# Altium PCB BQ25895-TEST.PcbDoc
Units mm, origin at the board's own origin, x right, y up, seen from the top; angles counter-clockwise.
Board outline 70 x 60 mm, 2 copper layers (Top Layer, Bottom Layer), stack 1.67 mm thick; 48 components, 46 nets, 185 pads, 61 vias.
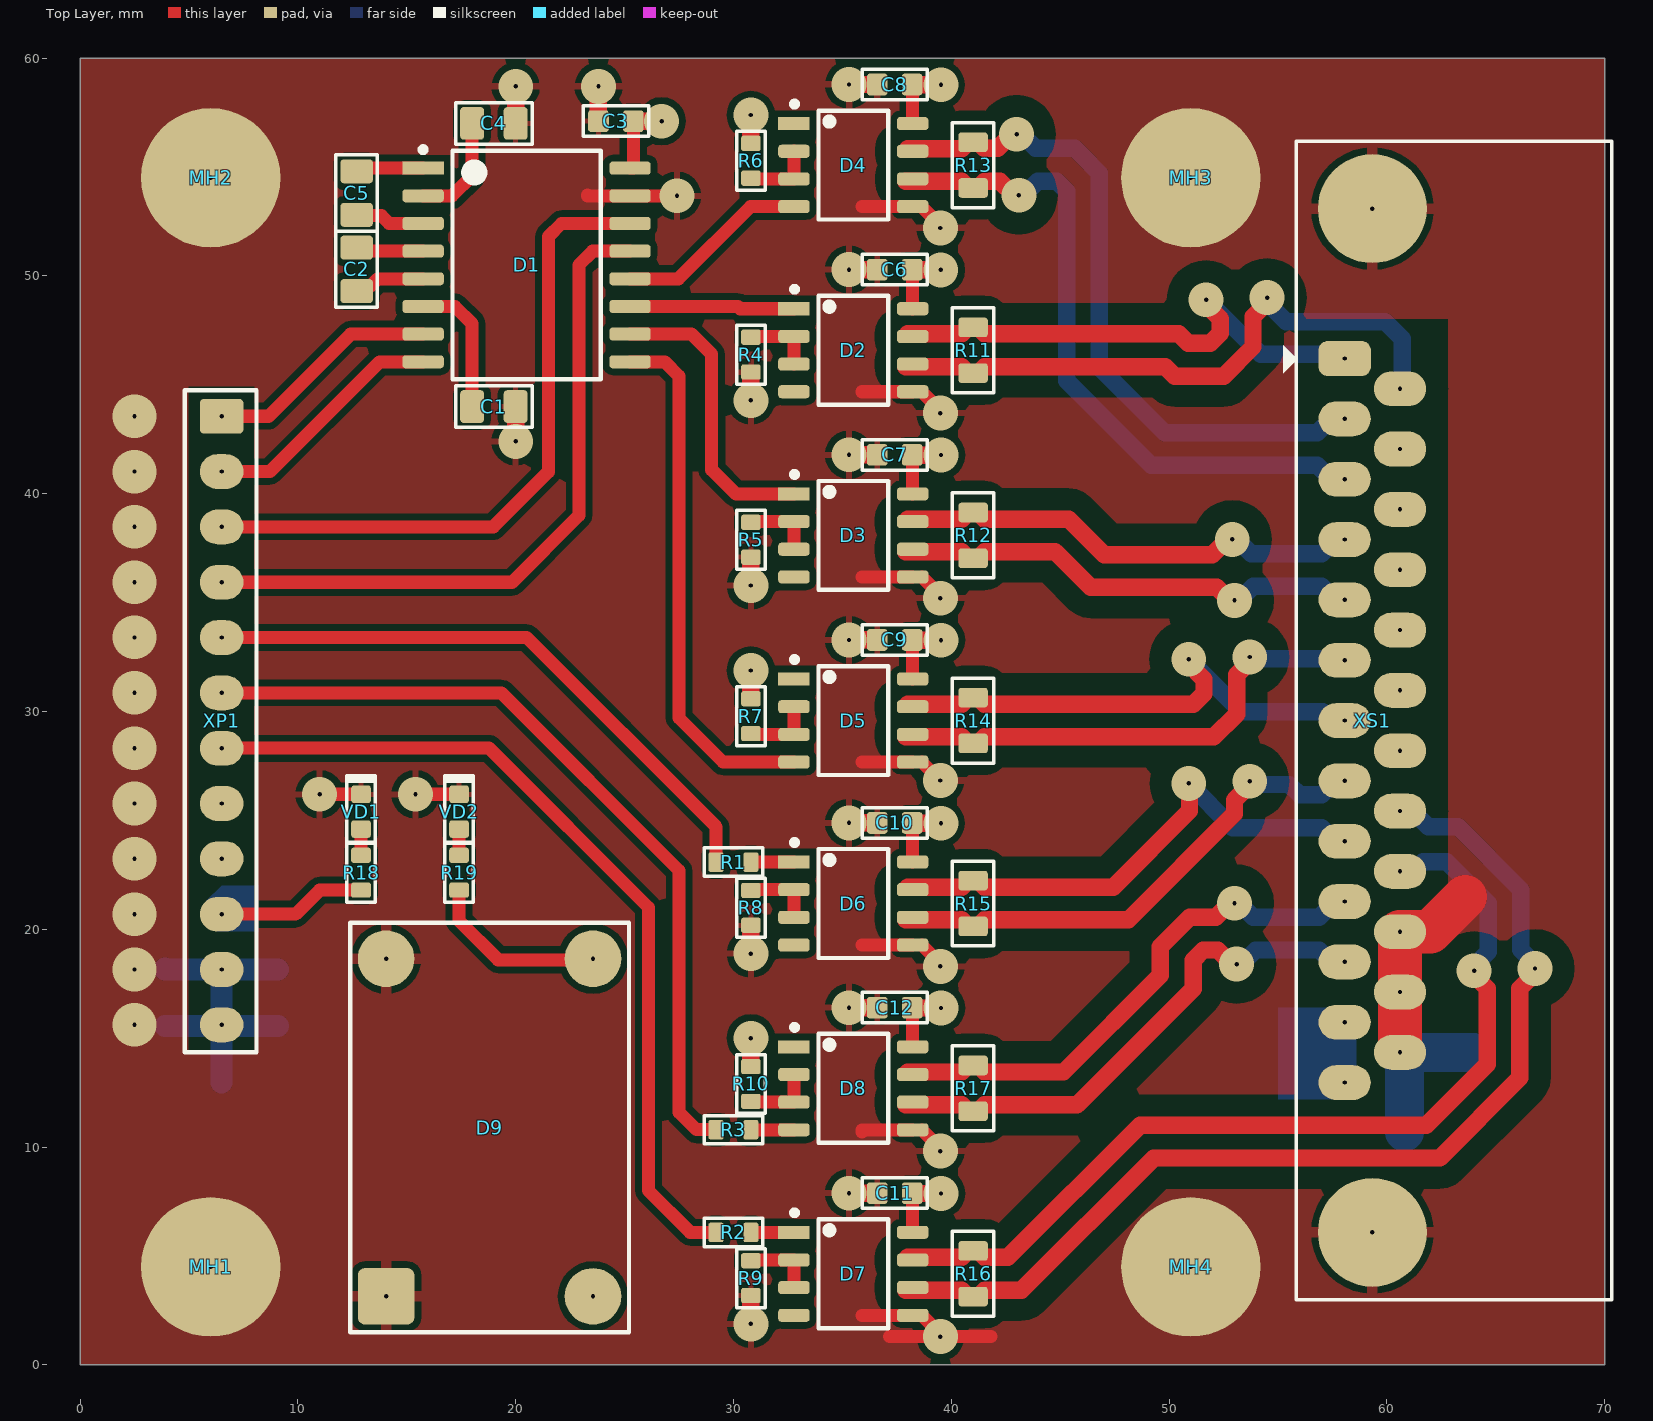
[diagram p0: Top Layer view]
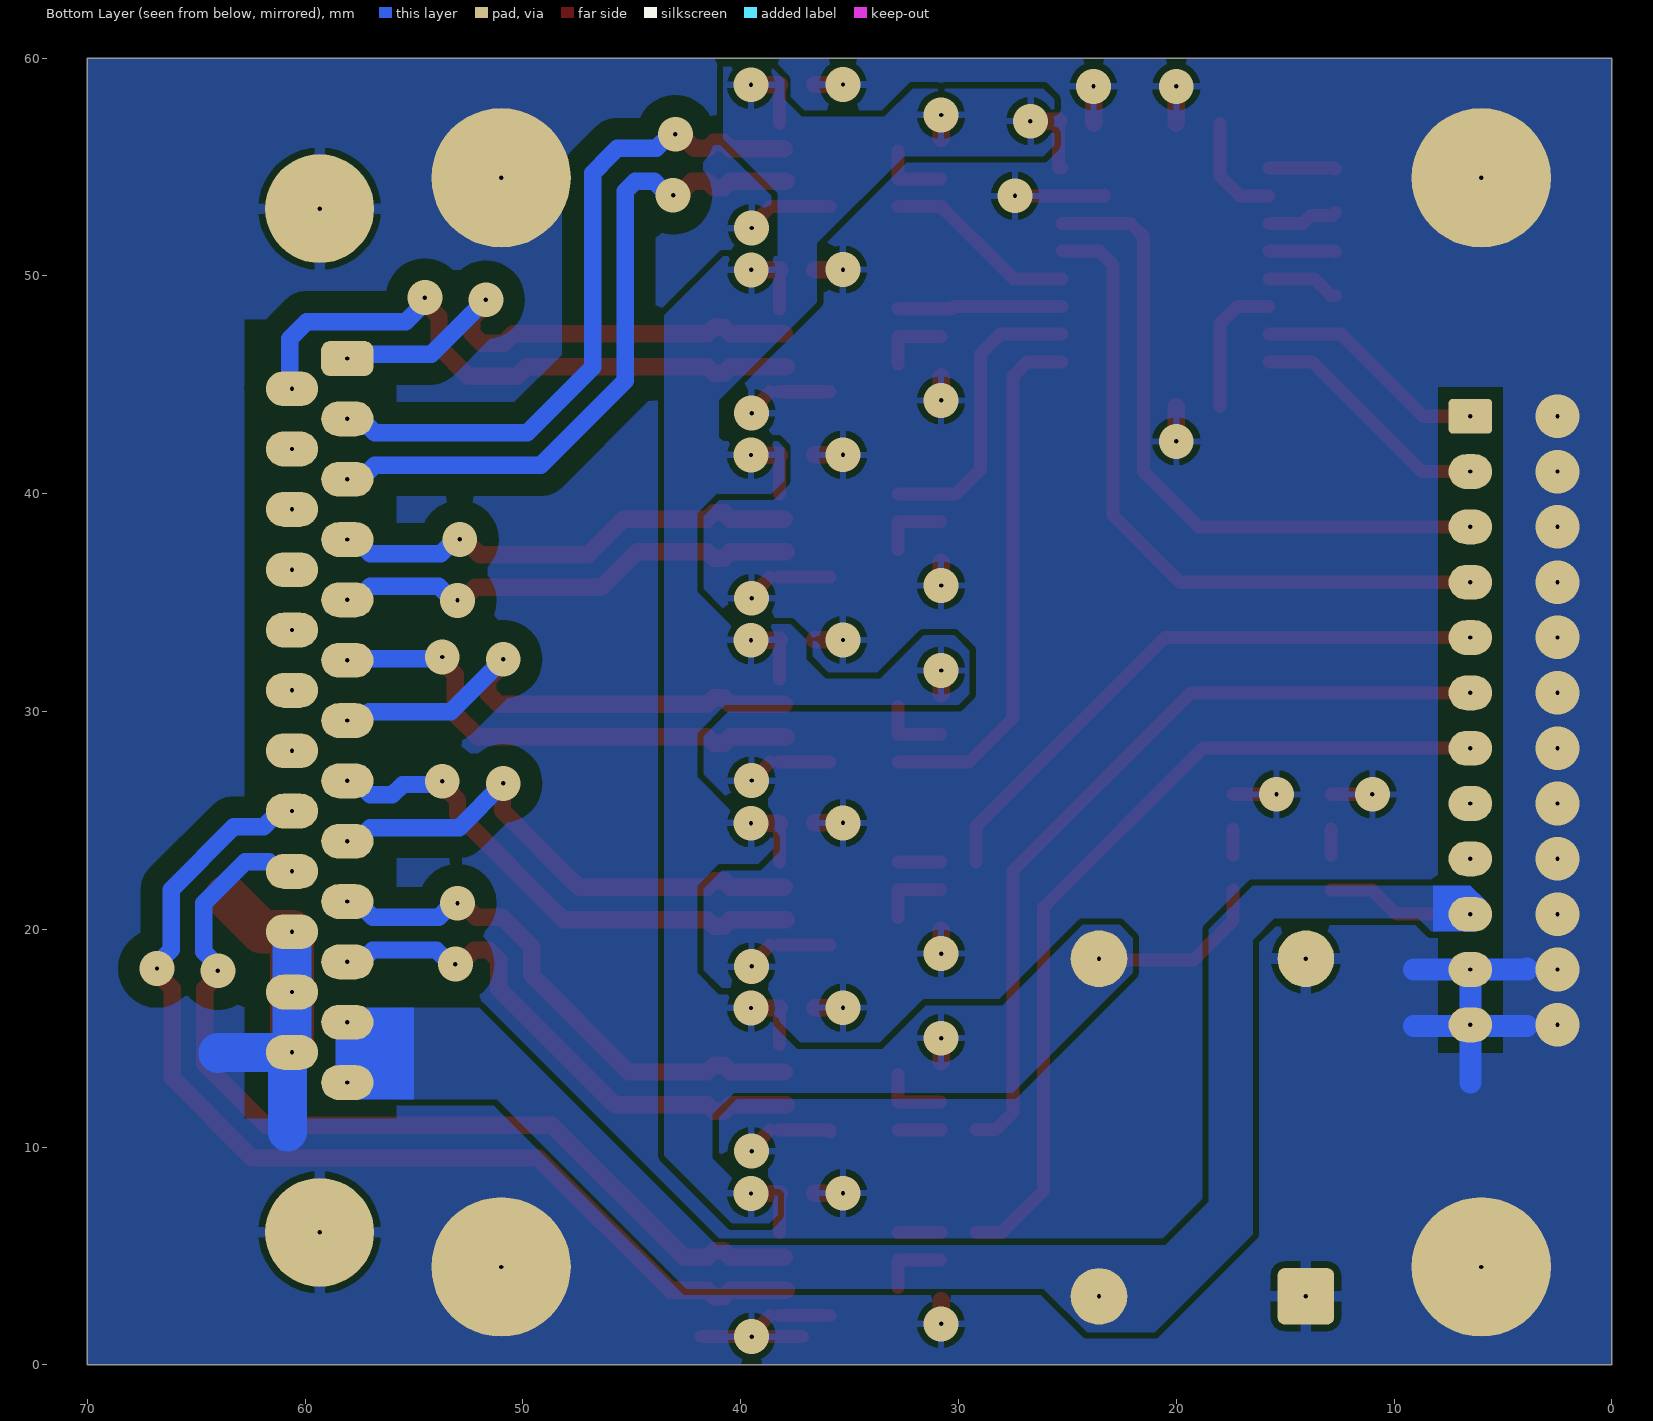
[diagram p1: Bottom Layer view, seen from below]
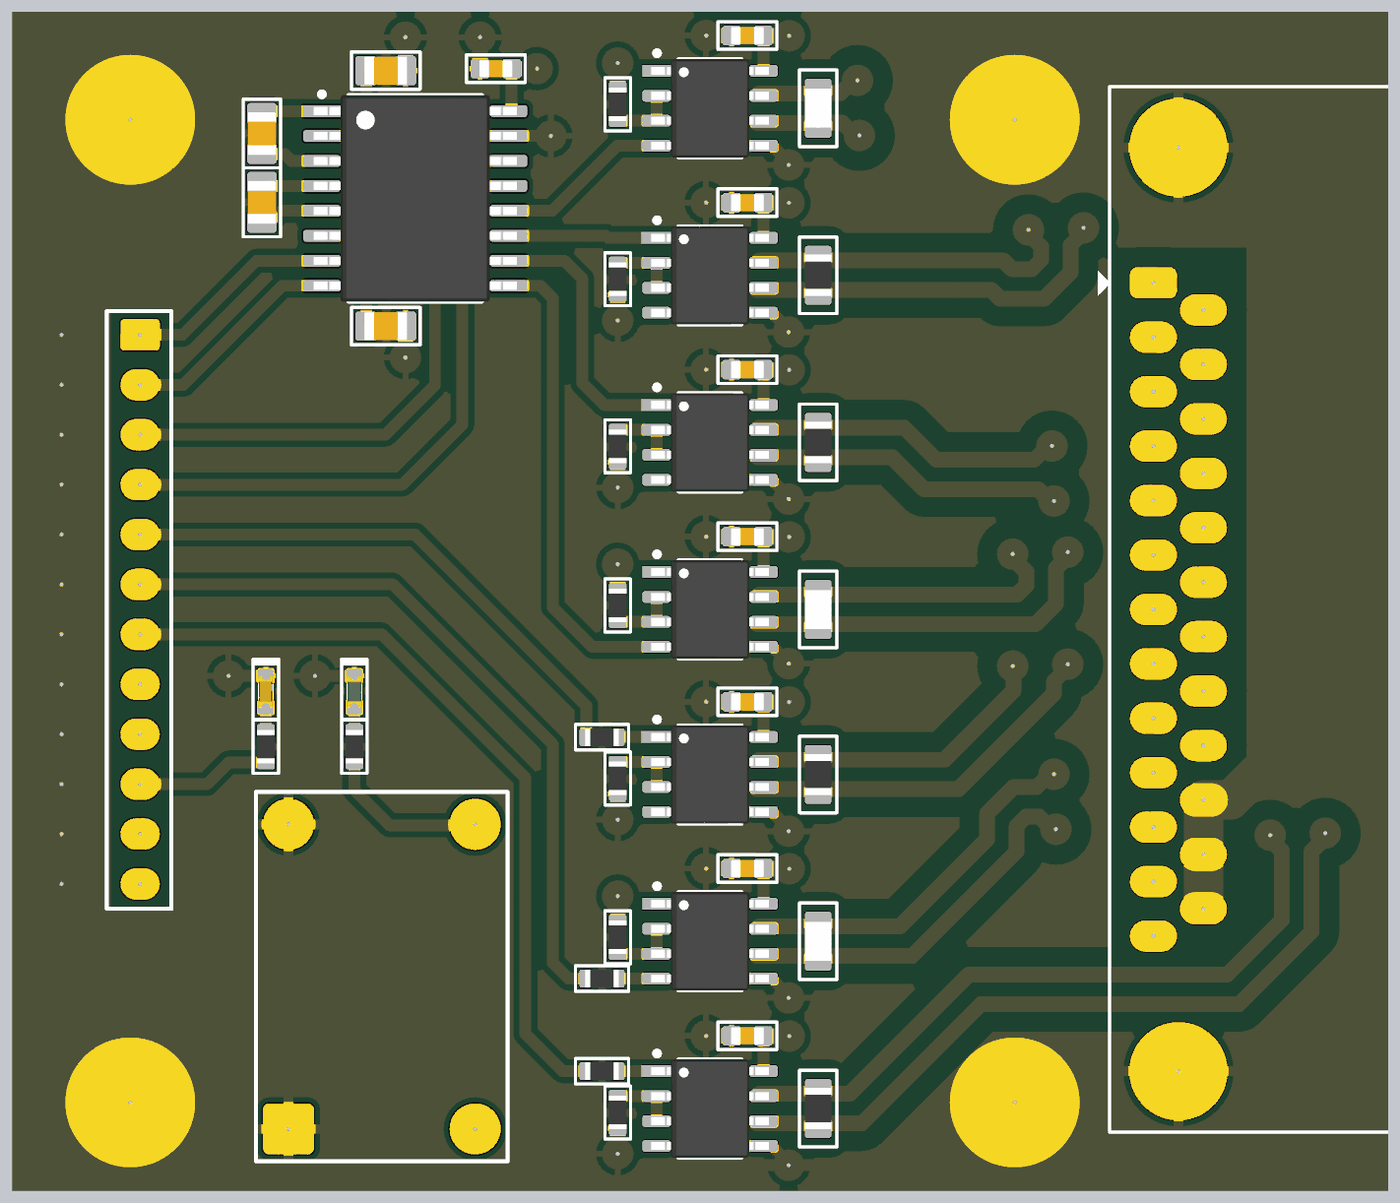
[diagram p2: 3D render of the assembled board from above, using the file's embedded part models]

## Layer stack, top to bottom
Top Layer: signal copper 0.035
Core-1: core 1.6, FR-4, Dk 4.6
Bottom Layer: signal copper 0.035

## Board outline
0,0 0,60 70,60 70,0

## Design rules (kind name [scope] priority, off if disabled: settings)
Clearance Clearance_POLY_RS-485 [InPolygon AND InNet('GND') vs InNetClass('RS-485')] p1: gap=0.3 ignorepadtopadclearanceinfootprint=FALSE except(0: Arc-Hole Track-Hole SMDPad-Hole THPad-Hole Via-Hole Fill-Hole Poly-Hole Region-Hole Text-Hole; 1: Track-Poly SMDPad-Poly THPad-Poly Via-Poly)
Clearance [All] p2: gap=0.3 ignorepadtopadclearanceinfootprint=FALSE
DiffPairsRouting DiffPairsRouting_DIFF120 [InDifferentialPairClass('DIFF120')] p1: maxlimit=0.7 minlimit=0.7 mostfreqgap=0.7 toplayer_minwidth=0.8 toplayer_maxwidth=1 toplayer_prefwidth=0.8 bottomlayer_minwidth=0.8 bottomlayer_maxwidth=1 bottomlayer_prefwidth=0.8 maxuncoupledlength=12.7
DiffPairsRouting [All] p2: maxlimit=0.6 minlimit=0.254 mostfreqgap=0.254 toplayer_minwidth=0.381 toplayer_maxwidth=0.6 toplayer_prefwidth=0.381 bottomlayer_minwidth=0.381 bottomlayer_maxwidth=0.6 bottomlayer_prefwidth=0.381 maxuncoupledlength=12.7
HoleSize [All] p1: absolutevalues=TRUE maxlimit=3.5 minlimit=0.025 maxpercent=80.000 minpercent=20.000
PolygonConnect [All] p1: connectstyle=Relief reliefconductorwidth=0.254 reliefentries=4 polygonreliefangle="90 Angle" airgapwidth=0.254
RoutingVias [All] p1: holewidth=0.711 width=1.27 viastyle="Through Hole" minholewidth=0.2 minwidth=1 maxholewidth=1.5 maxwidth=2.6
SolderMaskExpansion [All] p1: expansion=0.102 istentingtop=FALSE
Width [All] p1: maxlimit=3 minlimit=0.254 preferedwidth=0.254 minimp=50.000000 maximp=50.000000 favimp=50.000000
28 further rules are at their usual default settings.

## Classes and differential pairs
net class RS-485: RS232_CTS_N RS232_CTS_P RS232_RTS_N RS232_RTS_P RS232_RxD_N RS232_RxD_P RS232_TxD_N RS232_TxD_P SYNC_IN1_N SYNC_IN1_P SYNC_IN2_N SYNC_IN2_P SYNC_OUT_N SYNC_OUT_P
differential pair class DIFF120: RS232_CTS RS232_RTS RS232_RxD RS232_TxD SYNC_IN1 SYNC_IN2 SYNC_OUT
differential pair SYNC_OUT: +SYNC_OUT_P -SYNC_OUT_N
differential pair SYNC_IN2: +SYNC_IN2_P -SYNC_IN2_N
differential pair SYNC_IN1: +SYNC_IN1_P -SYNC_IN1_N
differential pair RS232_TxD: +RS232_TxD_P -RS232_TxD_N
differential pair RS232_RxD: +RS232_RxD_P -RS232_RxD_N
differential pair RS232_RTS: +RS232_RTS_P -RS232_RTS_N
differential pair RS232_CTS: +RS232_CTS_P -RS232_CTS_N

## Components (designator, comment, footprint, x,y, rotation, side; value= is the part's Value field where it differs from the comment)
C1 "10uF" CAPC_0805_2.0x1.2x1.35mm 19,44 r180 top value=10мкФ
C2 "10uF" CAPC_0805_2.0x1.2x1.35mm 12.7,50.3 r90 top value=10мкФ
C3 "0,1uF" CAPC_0603_1.6x0.8x0.9mm 24.6,57.1 r0 top value=0,1мкФ
C4 "10uF" CAPC_0805_2.0x1.2x1.35mm 19,57 r0 top value=10мкФ
C5 "10uF" CAPC_0805_2.0x1.2x1.35mm 12.7,53.8 r90 top value=10мкФ
C6 "0,1uF" CAPC_0603_1.6x0.8x0.9mm 37.4,50.285 r0 top value=0,1мкФ
C7 "0,1uF" CAPC_0603_1.6x0.8x0.9mm 37.4,41.785 r0 top value=0,1мкФ
C8 "0,1uF" CAPC_0603_1.6x0.8x0.9mm 37.4,58.785 r0 top value=0,1мкФ
C9 "0,1uF" CAPC_0603_1.6x0.8x0.9mm 37.4,33.285 r0 top value=0,1мкФ
C10 "0,1uF" CAPC_0603_1.6x0.8x0.9mm 37.4,24.885 r0 top value=0,1мкФ
C11 "0,1uF" CAPC_0603_1.6x0.8x0.9mm 37.4,7.885 r0 top value=0,1мкФ
C12 "0,1uF" CAPC_0603_1.6x0.8x0.9mm 37.4,16.4 r0 top value=0,1мкФ
D1 "MAX3232CDW" AD_RW-16_SOIC127P1030X265-16N 20.5,50.5 r0 top
D2 "ADM3072EARZ" TI_D0008A_8-SOIC_SOIC127P600X175-8N 35.5,46.585 r0 top
D3 "ADM3072EARZ" TI_D0008A_8-SOIC_SOIC127P600X175-8N 35.5,38.085 r0 top
D4 "ADM3072EARZ" TI_D0008A_8-SOIC_SOIC127P600X175-8N 35.5,55.085 r0 top
D5 "ADM3072EARZ" TI_D0008A_8-SOIC_SOIC127P600X175-8N 35.5,29.585 r0 top
D6 "ADM3072EARZ" TI_D0008A_8-SOIC_SOIC127P600X175-8N 35.5,21.185 r0 top
D7 "ADM3072EARZ" TI_D0008A_8-SOIC_SOIC127P600X175-8N 35.5,4.185 r0 top
D8 "ADM3072EARZ" TI_D0008A_8-SOIC_SOIC127P600X175-8N 35.5,12.7 r0 top
D9 "MP2307_DCDC" MP2307 18.8,10.9 r90 top
MH1 "M3" "MH M3 Drill=3.2mm Pad=6.4mm v2" 6,4.5 r0 top
MH2 "M3" "MH M3 Drill=3.2mm Pad=6.4mm v2" 6,54.5 r0 top
MH3 "M3" "MH M3 Drill=3.2mm Pad=6.4mm v2" 51,54.5 r0 top
MH4 "M3" "MH M3 Drill=3.2mm Pad=6.4mm v2" 51,4.5 r0 top
R1 "100R" RESC_0603_1.6x0.8x0.45mm 30,23.085 r0 top value=100
R2 "100R" RESC_0603_1.6x0.8x0.45mm 30,6.085 r0 top value=100
R3 "100R" RESC_0603_1.6x0.8x0.45mm 30,10.8 r0 top value=100
R4 "4,7k" RESC_0603_1.6x0.8x0.45mm 30.8,46.385 r270 top value=4,7к
R5 "4,7k" RESC_0603_1.6x0.8x0.45mm 30.8,37.885 r270 top value=4,7к
R6 "4,7k" RESC_0603_1.6x0.8x0.45mm 30.8,55.285 r90 top value=4,7к
R7 "4,7k" RESC_0603_1.6x0.8x0.45mm 30.8,29.785 r90 top value=4,7к
R8 "4,7k" RESC_0603_1.6x0.8x0.45mm 30.8,20.985 r270 top value=4,7к
R9 "4,7k" RESC_0603_1.6x0.8x0.45mm 30.8,3.985 r270 top value=4,7к
R10 "4,7k" RESC_0603_1.6x0.8x0.45mm 30.8,12.9 r90 top value=4,7к
R11 "120R" RESC_0805_2.0x1.25x0.65mm 41,46.585 r270 top value=120
R12 "120R" RESC_0805_2.0x1.25x0.65mm 41,38.085 r270 top value=120
R13 "120" RESC_0805_2.0x1.25x0.65mm 41,55.085 r270 top
R14 "120" RESC_0805_2.0x1.25x0.65mm 41,29.585 r270 top
R15 "120R" RESC_0805_2.0x1.25x0.65mm 41,21.185 r270 top value=120
R16 "120R" RESC_0805_2.0x1.25x0.65mm 41,4.185 r270 top value=120
R17 "120" RESC_0805_2.0x1.25x0.65mm 41,12.7 r270 top
R18 "2k" RESC_0603_1.6x0.8x0.45mm 12.9,22.6 r270 top value=2к
R19 "240R" RESC_0603_1.6x0.8x0.45mm 17.4,22.6 r270 top value=240
VD1 "\"+12V\"" LED_0603_1.6x0.8x0.75mm_RED 12.9,25.4 r270 top
VD2 "\"+3.3V\"" LED_0603_1.6x0.8x0.75mm_GREEN 17.4,25.4 r270 top
XP1 "PLS-12_2.54mm" PLS-12_2.54mm 6.5,29.585 r270 top
XS1 "09663526613" "D-Sub 25F RA PTH HARTING 09663526613" 59.33,29.585 r90 top

## Footprints (in the part's own frame and the unit in brackets; to place one, negate y for a bottom-side part, rotate by r counter-clockwise, add the part's x,y. Pads: shape width x height; smd on the part's side, far side on the other; paste and mask are expansions set on the pad)
AD_RW-16_SOIC127P1030X265-16N [mm] "SOIC, 16-Leads, Body 10,30x7,50mm, Pitch 1,27mm, IPC Medium Density"
  rect 1.9x0.6 smd: 1(-4.75,4.445)
  rrect50% 1.9x0.6 smd: 2(-4.75,3.175) 3(-4.75,1.905) 4(-4.75,0.635) 5(-4.75,-0.635) 6(-4.75,-1.905) 7(-4.75,-3.175) 8(-4.75,-4.445) 9(4.75,-4.445) 10(4.75,-3.175) 11(4.75,-1.905) 12(4.75,-0.635) 13(4.75,0.635) 14(4.75,1.905) 15(4.75,3.175) 16(4.75,4.445)
  silkscreen extent -4.87,-5.25 3.4,5.42, body extent -5.16,-5.25 5.16,5.25, height 2.65
CAPC_0603_1.6x0.8x0.9mm [mm]
  rrect30% 0.95x1 smd mask+0.05: 1(-0.8,0) 2(0.8,0)
  silkscreen extent -1.5,-0.7 1.5,0.7, body extent -0.85,-0.45 0.85,0.45, height 0.9
CAPC_0805_2.0x1.2x1.35mm [mm] "Chip Capacitor, 2-Leads, Body 2.10x1.35mm, IPC Medium Density"
  rrect30% 1.1x1.5 smd mask+0.05: 1(-1,0) 2(1,0)
  silkscreen extent -1.75,-0.95 1.75,0.95, body extent -1.1,-0.72 1.1,0.73, height 1.35
"D-Sub 25F RA PTH HARTING 09663526613" [mm]
  rrect50% 1.6x2.4 hole 0.2 mask+0.05: 1(16.62,1.27)
  oval 1.6x2.4 hole 0.2 mask+0.05: 2(13.85,1.27) 3(11.08,1.27) 4(8.31,1.27) 5(5.54,1.27) 6(2.77,1.27) 7(0,1.27) 8(-2.77,1.27) 9(-5.54,1.27) 10(-8.31,1.27) 11(-11.08,1.27) 12(-13.85,1.27) 13(-16.62,1.27) 14(15.235,-1.27) 15(12.465,-1.27) 16(9.695,-1.27) 17(6.925,-1.27) 18(4.155,-1.27) 19(1.385,-1.27) 20(-1.385,-1.27) 21(-4.155,-1.27) 22(-6.925,-1.27) 23(-9.695,-1.27) 24(-12.465,-1.27) 25(-15.235,-1.27)
  round 5 hole 0.2 mask+0.05: 26(-23.5,0) 27(23.5,0)
  silkscreen extent -26.6,-11 26.6,4.1, body extent -26.6,-17.9 26.6,3.3, height 13.61
LED_0603_1.6x0.8x0.75mm_GREEN [mm] "Kingbright APT1608"
  rrect30% 0.8x0.9 smd paste-0.05 mask+0.05: 1(-0.8,0) 2(0.8,0)
  silkscreen extent -1.65,-0.65 1.4,0.65, body extent -0.8,-0.4 0.8,0.4, height 0.6
LED_0603_1.6x0.8x0.75mm_RED [mm] "Kingbright APT1608"
  rrect30% 0.8x0.9 smd paste-0.05 mask+0.05: 1(-0.8,0) 2(0.8,0)
  silkscreen extent -1.65,-0.65 1.4,0.65, body extent -0.8,-0.4 0.8,0.4, height 0.6
"MH M3 Drill=3.2mm Pad=6.4mm v2" [mm]
  round 6.4 hole 0.2: 0(0,0)
MP2307 [mm] "SOIC, 16-Leads, Body 10,30x7,50mm, Pitch 1,27mm, IPC Medium Density"
  rrect25% 2.6x2.6 hole 0.2 paste-0.675 mask+0.076: 1(-7.75,4.75)
  round 2.6 hole 0.2 paste-0.675 mask+0.076: 2(-7.75,-4.75) 3(7.75,4.75) 4(7.75,-4.75)
  silkscreen extent -9.4,-6.4 9.4,6.4
PLS-12_2.54mm [mm]
  rrect25% 1.6x2 hole 0.2 paste-0.675 mask+0.076: 1(-13.97,0)
  oval 1.6x2 hole 0.2 paste-0.675 mask+0.076: 2(-11.43,0) 3(-8.89,0) 4(-6.35,0) 5(-3.81,0) 6(-1.27,0) 7(1.27,0) 8(3.81,0) 9(6.35,0) 10(8.89,0) 11(11.43,0) 12(13.97,0)
  silkscreen extent -15.17,-1.7 15.23,1.6
RESC_0603_1.6x0.8x0.45mm [mm]
  rrect30% 0.7x0.9 smd mask+0.05: 1(-0.8,0) 2(0.8,0)
  silkscreen extent -1.35,-0.65 1.35,0.65, body extent -0.85,-0.45 0.85,0.45, height 0.5
RESC_0805_2.0x1.25x0.65mm [mm] "Chip Resistor, 2-Leads, Body 2.00x1.25mm, IPC Medium Density"
  rrect30% 0.9x1.35 smd mask+0.05: 1(-1.05,0) 2(1.05,0)
  silkscreen extent -1.95,-0.95 1.95,0.95, body extent -1.05,-0.67 1.05,0.68, height 0.6
TI_D0008A_8-SOIC_SOIC127P600X175-8N [mm] "SOIC, 8-Leads, Body 4.90x3.90mm, Pitch 1.27mm, IPC Medium Density"
  rect 1.45x0.6 smd mask+0.05: 1(-2.725,1.905)
  rrect50% 1.45x0.6 smd mask+0.05: 2(-2.725,0.635) 3(-2.725,-0.635) 4(-2.725,-1.905) 5(2.725,-1.905) 6(2.725,-0.635) 7(2.725,0.635) 8(2.725,1.905)
  silkscreen extent -2.82,-2.5 1.6,2.92, body extent -3,-2.5 3,2.5, height 1.75

## Part data
C1 C2 C4 C5: library part CAP_FIXED_SMD_0805, "Capacitor Ceramic *pF ±*% *V X7R 0805", Dielectric=X7R, Max Operating Temperature=+125°C, Min Operating Temperature=-55°C, Package=0805, Tolerance=±*%, Voltage=*В, ComponentLink1Description="Datasheet Link", Mount=SMT, Name="10мкФ ±*% *В X7R 0805 * [*]", Number of Pins=2, Type="Конденсатор керамічний"
C3 C6 C7 C8 C9 C10 C11 C12: library part CAP_FIXED_SMD_0603, "Capacitor Ceramic *pF ±*% *V X7R 0603", Dielectric=X7R, Max Operating Temperature=+125°C, Min Operating Temperature=-55°C, Package=0603, Tolerance=±*%, Voltage=*В, ComponentLink1Description="Datasheet Link", Mount=SMT, Name="0,1мкФ ±*% *В X7R 0603 * [*]", Number of Pins=2, Type="Конденсатор керамічний"
D1: "MAX3232 3-V to 5.5-V Multichannel RS-232 Line Driver and Receiver With ±15-kV ESD Protection 16-SOIC [7.5mm]", Manufacturer="Maxim Integrated", Max Operating Temperature=+85°C, Min Operating Temperature=-40°C, Package="16-SOIC [7.5mm]", Component Function=RS-232, Mount=SMT, Name="MAX3232CDW [Maxim Integrated]", Number of Pins=16, Part Number=MAX3232CDW, Type=Мікросхема
D2 D3 D4 D5 D6 D7 D8: "3.3 V, ±15 kV ESD-Protected, Half- and Full-Duplex, RS-485/RS-422 Transceivers", Manufacturer="Analog Devices", Max Operating Temperature=+85°C, Min Operating Temperature=-40°C, Package="8-SOIC [3.9mm]", Component Function=RS-485, Mount=SMT, Name="ADM3072EARZ [Analog Devices]", Number of Pins=8, Part Number=ADM3072EARZ, Type=Мікросхема
D9: "MP2307 DCDC Module", Manufacturer="Analog Devices", Max Operating Temperature=+85°C, Min Operating Temperature=-40°C, Package="8-SOIC [3.9mm]", Component Function=RS-485, Mount=SMT, Name="MP2307_DCDC [Analog Devices]", Number of Pins=8, Part Number=MP2307_DCDC, Type=Мікросхема
MH1 MH2 MH3 MH4: library part "MOUNTING HOLE M3 v2", "Mounting Hole"
R1 R2 R3 R4 R5 R6 R7 R8 R9 R10 R18 R19: library part RES_FIXED_SMD_0603, "Resistor SMD * Ohm ±*% ±*ppm/°C 1/10W 0603", Manufacturer=Yageo, Max Operating Temperature=+125°C, Min Operating Temperature=-55°C, Package=0603, Power Rating="1/10 Вт", Tolerance=±1%, ComponentLink1Description="Datasheet Link", Mount=SMT, Number of Pins=2, Type=Резистор
  R1 R2 R3: Name="100Ом ±1% 1/10 Вт 0603 * [Yageo]"
  R4 R5 R6 R7 R8 R9 R10: Name="4,7кОм ±1% 1/10 Вт 0603 * [Yageo]"
  R18: Name="2кОм ±1% 1/10 Вт 0603 * [Yageo]"
  R19: Name="240Ом ±1% 1/10 Вт 0603 * [Yageo]"
R11 R12 R13 R14 R15 R16 R17: library part RES_FIXED_SMD_0805, "Resistor SMD * Ohm ±*% ±*ppm/°C 1/8W 0805", Manufacturer=Yageo, Max Operating Temperature=+125°C, Min Operating Temperature=-55°C, Package=0805, Power Rating="1/8 Вт", Tolerance=±1%, ComponentLink1Description="Datasheet Link", Mount=SMT, Name="120Ом ±1% 1/8 Вт 0805 * [Yageo]", Number of Pins=2, Type=Резистор
VD1: library part "LED SMD 0603 RED", "LED Red 1.95V 20mA SMD 0603", Color=Червоний, Current=20мА, Forward Voltage=1.95В, Manufacturer=Kingbright, Max Operating Temperature=+85°C, Min Operating Temperature=-40°C, Package=0603, Part Number=APT1608SURCK, Voltage=250V, ComponentLink1Description="Datasheet Link", Mount=SMT, Name="APT1608SURCK [Kingbright]", Number of Pins=2, Type=Діод
VD2: library part "LED SMD 0603 GREEN", "LED Green 2.1V 20mA SMD 0603", Color=Зелений, Current=20мА, Forward Voltage=2.1В, Manufacturer=Kingbright, Max Operating Temperature=+85°C, Min Operating Temperature=-40°C, Package=0603, Part Number=APT1608CGCK, Voltage=250V, ComponentLink1Description="Datasheet Link", Mount=SMT, Name="APT1608CGCK [Kingbright]", Number of Pins=2, Type=Діод
XP1: Manufacturer=Molex, Max Operating Temperature=+125°C, Min Operating Temperature=-55°C, Part Number=0702461201, ComponentLink1Description="Datasheet Link", Mount=PTH, Name="PLS-12_2.54mm 0702461201 [Molex]", Number of Pins=12, System=Connector, Type=Вилка
XS1: library part "D-Sub 25F RA PTH HARTING 09663526613", "D-Sub Receptacle 25 Position Through-Hole Right-Angle", Manufacturer=HARTING, Max Operating Temperature=+125°C, Min Operating Temperature=-55°C, ComponentLink1Description="Datasheet Link", Mount=PTH, Name="D-Sub Receptacle 25 Position Through-Hole Right-Angle 09663526613 [HARTING]", Number of Pins=25, Part Number=09663526613, System=Connector, Type=Вилка

## Via types
v1: diameter 1.6, hole 0.2, Top Layer to Bottom Layer, tented both sides, 49 vias
v2: diameter 2, hole 0.2, Top Layer to Bottom Layer, tented both sides, 12 vias

## Nets (pads, with @x,y where several pads share a name; then routed paths per layer and width w, separated by ;. In a path a pad name is that pad's centre, name@x,y a point inside that pad or via, vN(x,y) a via of type N, cw(c..) or ccw(c..) an arc to the next point about the centre after c; other vN are vias at no path point)
+3.3V: C3.2 C6.2 C7.2 C8.2 C9.2 C10.2 C11.2 C12.2 D1.16 D2.8 D3.8 D4.8 D5.8 D6.8 D7.8 D8.8 D9.4 R6.2 R7.2 R10.2 R19.2 | length 36.8
  Top Layer w0.6: R19.2 17.4,20.4 19.2,18.6 23.5,18.6 D9.4 ; D1.16 25.4,54.945 C3.2 ; C6.2 38.213,50.273 38.213,48.49 D2.8 ; D7.8 C11.2@38.225,7.872 ; D8.8@38.225,14.705 C12.2@38.225,16.488 ; D6.8 C10.2@38.225,24.873 ; D5.8 C9.2@38.225,33.272 ; D3.8 C7.2@38.225,41.772 ; D4.8 C8.2@38.225,58.772
  Top Layer w0.8: C3.2 v1(26.7,57.1) ; R10.2@30.8,13.925 v1(30.8,15) ; R7.2@30.8,30.81 v1(30.8,31.885) ; R6.2@30.8,56.31 v1(30.8,57.385) ; C6.2@38.213,50.273 v1(39.513,50.273) ; C11.2@38.225,7.872 v1(39.525,7.872) ; C12.2@38.225,16.388 v1(39.525,16.388) ; C10.2@38.225,24.873 v1(39.525,24.873) ; C9.2@38.225,33.272 v1(39.525,33.272) ; C7.2@38.225,41.772 v1(39.525,41.772) ; C8.2@38.225,58.772 v1(39.525,58.772)
+12V: D9.2 R18.2 XP1.10 XS1.12 XS1.13 | length 6.9
  Top Layer w0.6: XP1.10 9.895,20.695 11,21.8 R18.2
CTS: D1.11 D2.1 | length 7.6
  Top Layer w0.6: D1.11 30.205,48.595 30.31,48.49 D2.1
GND: C1.1 C3.1 C4.2 C6.1 C7.1 C8.1 C9.1 C10.1 C11.1 C12.1 D1.15 D2.5 D3.5 D4.5 D5.5 D6.5 D7.5 D8.5 D9.1 D9.3 MH1.0 MH2.0 MH3.0 MH4.0 R4.2 R5.2 R8.2 R9.2 VD1.1 VD2.1 XP1.11 XP1.12 XS1.23 XS1.24 XS1.25 XS1.26 XS1.27 | length 93.5
  Top Layer w0.6: v1(11,26.2) VD1.1 ; v1(15.4,26.2) VD2.1 ; 23.3,53.7 23.3,53.675 D1.15 v1(27.405,53.675) ; C3.1@23.7,57.2 C3.1 ; 35.9,2.28 D7.5 ; 35.9,10.7 35.9,10.795 D8.5 ; 35.9,19.28 D6.5 ; 35.9,27.68 D5.5 ; 35.9,36.18 D3.5 ; 35.9,44.68 D2.5 ; 35.9,53.18 D4.5 38.65,53.18 39.5,52.33 v1(39.5,52.2) ; 37.175,1.3 v1(39.5,1.3) 41.825,1.3 ; D7.5@38.65,2.28 v1@39.5,1.43 ; D8.5@38.65,10.795 v1@39.5,9.945 ; D6.5@38.65,19.28 v1@39.5,18.43 ; D5.5@38.65,27.68 v1(39.5,26.83) ; D3.5@38.65,36.18 v1@39.5,35.33 ; D2.5@38.65,44.68 v1@39.5,43.83
  Top Layer w0.8: v1(20,42.4) C1.1 ; C4.2 v1(20,58.7) ; C3.1@23.8,57 C3.1 v1(23.8,58.7) ; v1(30.8,1.885) R9.2@30.8,2.96 ; v1(30.8,18.885) R8.2@30.8,19.96 ; v1(30.8,35.785) R5.2@30.8,36.86 ; v1(30.8,44.285) R4.2@30.8,45.36 ; v1(35.3,7.885) C11.1 ; v1(35.3,16.4) C12.1 ; v1(35.3,24.885) C10.1 ; v1(35.3,33.285) C9.1 ; v1(35.3,41.785) C7.1 ; v1(35.3,50.285) C6.1 ; v1(35.3,58.785) C8.1
  Top Layer w2: XS1.25@60.6,14.6 XS1.24 XS1.23 61.99,19.89 63.6,21.5
  Bottom Layer w1: 3.9,15.555 XP1.12@6.5,15.555 ; 3.9,18.2 3.9,18.155 XP1.11 ; 6.5,12.955 XP1.12@6.5,15.555 ; 9.1,15.555 XP1.12@6.5,15.555 ; 9.1,18.155 XP1.11 ; XP1.12@6.5,15.555 XP1.11
  Bottom Layer w1.8: XS1.25 XS1.25@60.8,14.35 ; XS1.25@60.6,14.4 XS1.24 XS1.23@60.6,19.6 ; 60.8,10.7 XS1.25@60.8,14.35 ; 64,14.3 64,14.35 XS1.25@60.8,14.35
  other v1: 39.5,9.815 39.5,18.3 39.5,35.2 39.5,43.7
  other v2: 2.5,15.615 2.5,18.155 2.5,20.695 2.5,23.235 2.5,25.775 2.5,28.315 2.5,30.855 2.5,33.4 2.5,35.935 2.5,38.475 2.5,41.015 2.5,43.555
NetC1_2: C1.2 D1.6 | length 6.4
  Top Layer w0.6: D1.6 17.205,48.595 18,47.8 C1.2
NetC2_1: C2.1 D1.5 | length 3.4
  Top Layer w0.6: C2.1@12.7,49.1 12.9,49.1 13.665,49.865 D1.5
NetC2_2: C2.2 D1.4 | length 3.1
  Top Layer w0.6: C2.2@12.7,51.1 12.735,51.135 D1.4
NetC4_1: C4.1 D1.2 | length 5
  Top Layer w0.6: D1.2 17.075,53.675 18,54.6 C4.1
NetC5_1: C5.1 D1.3 | length 3.3
  Top Layer w0.6: C5.1@12.7,52.9 12.838,52.762 13.838,52.762 14.195,52.405 D1.3
NetC5_2: C5.2 D1.1 | length 3.1
  Top Layer w0.6: C5.2@12.7,54.9 12.745,54.945 D1.1
NetD1_7: D1.7 XP1.1 | length 10.8
  Top Layer w0.6: XP1.1 8.655,43.555 12.425,47.325 D1.7
NetD1_8: D1.8 XP1.2 | length 11.3
  Top Layer w0.6: XP1.2 8.715,41.015 13.755,46.055 D1.8
NetD1_13: D1.13 XP1.4 | length 31.8
  Top Layer w0.6: XP1.4 19.835,35.935 22.9,39 22.9,50.5 23.535,51.135 D1.13
NetD1_14: D1.14 XP1.3 | length 30.8
  Top Layer w0.6: XP1.3 18.975,38.475 21.5,41 21.5,51.8 22.105,52.405 D1.14
NetD2_2: D2.2 D2.3 R4.1 | length 3.3
  Top Layer w0.6: R4.1 30.835,47.22 D2.2 D2.3
NetD3_2: D3.2 D3.3 R5.1 | length 3.2
  Top Layer w0.6: R5.1@30.835,38.72 D3.2 D3.3
NetD4_2: D4.2 D4.3 R6.1 | length 3.2
  Top Layer w0.6: R6.1@30.835,54.45 D4.3 D4.2
NetD5_2: D5.2 D5.3 R7.1 | length 3.2
  Top Layer w0.6: R7.1@30.835,28.95 D5.3 D5.2
NetD6_1: D6.1 R1.2 | length 2
  Top Layer w0.6: R1.2 30.805,23.09 D6.1
NetD6_2: D6.2 D6.3 R8.1 | length 3.2
  Top Layer w0.6: R8.1@30.835,21.82 D6.2 D6.3
NetD7_1: D7.1 R2.2 | length 2
  Top Layer w0.6: R2.2 30.805,6.09 D7.1
NetD7_2: D7.2 D7.3 R9.1 | length 3.2
  Top Layer w0.6: R9.1@30.835,4.82 D7.2 D7.3
NetD8_2: D8.2 D8.3 R10.1 | length 3.2
  Top Layer w0.6: R10.1@30.835,12.065 D8.3 D8.2
NetD8_4: D8.4 R3.2 | length 2
  Top Layer w0.6: R3.2 30.805,10.795 D8.4
NetR1_1: R1.1 XP1.5 | length 27.9
  Top Layer w0.6: XP1.5 20.505,33.395 29.2,24.7 R1.1
NetR2_1: R2.1 XP1.7 | length 39.5
  Top Layer w0.6: XP1.7 18.785,28.315 26.1,21 26.1,8 28.015,6.085 R2.1
NetR3_1: R3.1 XP1.6 | length 37.5
  Top Layer w0.6: XP1.6 19.345,30.855 27.5,22.7 27.5,11.6 28.3,10.8 R3.1
NetR18_1: R18.1 VD1.2 | length 1.2
  Top Layer w0.6: R18.1 VD1.2
NetR19_1: R19.1 VD2.2 | length 1.2
  Top Layer w0.6: R19.1 VD2.2
RS232_CTS_N: D2.7 R11.1 XS1.1 | length 23.9
  Top Layer w0.8: D2.7@38,47.335 40.475,47.335 R11.1@40.775,47.635 ; R11.1 41.225,47.635 41.525,47.335 50.437,47.335 50.872,46.9 51.881,46.9 52.35,47.369 52.35,48.034 51.7,48.684 v1(51.7,48.9)
  Bottom Layer w0.8: v1(51.7,48.9) 54.2,46.4 XS1.1@58.06,46.4
RS232_CTS_P: D2.6 R11.2 XS1.14 | length 28.5
  Top Layer w0.8: D2.6@37.9,45.835 40.475,45.835 R11.2@40.775,45.535 ; R11.2 41.225,45.535 41.525,45.835 49.815,45.835 50.25,45.4 52.503,45.4 53.85,46.747 53.85,48.134 54.5,48.784 v1(54.5,49)
  Bottom Layer w0.8: v1(54.5,49) 54.5,48.784 54.9,48.384 54.9,48.369 55.369,47.9 59.921,47.9 60.7,47.121 XS1.14@60.7,45
RS232_RTS_N: D5.7 R14.1 XS1.7 | length 24
  Top Layer w0.8: D5.7@38,30.335 40.475,30.335 R14.1@40.775,30.635 ; R14.1 41.225,30.635 41.525,30.335 51.114,30.335 51.6,30.821 51.6,31.484 v1@50.9,32.184 ; v1(50.9,32.4) v1@51.053,32.247
  Bottom Layer w0.8: v1(50.9,32.4) 53.316,29.984 57.045,29.984 57.444,29.585 XS1.7
RS232_RTS_P: D5.6 R14.2 XS1.6 | length 23.6
  Top Layer w0.8: D5.6@37.9,28.835 40.475,28.835 R14.2@40.775,28.535 ; R14.2 41.225,28.535 41.525,28.835 52.056,28.835 53.1,29.879 53.1,31.684 v1@53.7,32.284
  Bottom Layer w0.8: v1@53.7,32.284 v1(53.7,32.5) 53.773,32.427 57.988,32.427 XS1.6 XS1.6@57.444,32.355
RS232_RxD_N: D3.7 R12.1 XS1.4 | length 21.6
  Top Layer w0.8: D3.7@38,38.835 40.475,38.835 R12.1@40.775,39.135 ; R12.1 41.225,39.135 41.525,38.835 45.383,38.835 47.018,37.2 51.984,37.2 52.684,37.9 v1(52.9,37.9)
  Bottom Layer w0.8: v1(52.9,37.9) 53.116,37.9 53.766,37.25 57,37.25 57.645,37.895 XS1.4
RS232_RxD_P: D3.6 R12.2 XS1.5 | length 21.6
  Top Layer w0.8: D3.6@37.9,37.335 40.475,37.335 R12.2@40.775,37.035 ; R12.2 41.225,37.035 41.525,37.335 44.761,37.335 46.396,35.7 52.184,35.7 52.784,35.1 v1(53,35.1)
  Bottom Layer w0.8: v1(53,35.1) 53.216,35.1 53.866,35.75 57,35.75 57.625,35.125 XS1.5
RS232_TxD_N: D4.7 R13.1 XS1.2 | length 31.7
  Top Layer w0.8: D4.7@38,55.835 40.475,55.835 40.775,56.135 R13.1 41.225,56.135 41.51,55.85 42.134,55.85 42.784,56.5 v1(43,56.5)
  Bottom Layer w0.8: v1(43,56.5) 43.216,56.5 43.866,55.85 45.671,55.85 46.001,55.52 46.8,54.721 46.8,45.8 49.8,42.8 56.809,42.8 57.444,43.435 XS1.2
RS232_TxD_P: D4.6 R13.2 XS1.3 | length 31.7
  Top Layer w0.8: D4.6@37.9,54.335 40.475,54.335 40.775,54.035 R13.2 41.225,54.035 41.54,54.35 42.234,54.35 42.884,53.7 v1(43.1,53.7)
  Bottom Layer w0.8: v1(43.1,53.7) 43.316,53.7 43.966,54.35 44.831,54.35 45.3,53.881 45.3,45.179 49.179,41.3 56.809,41.3 57.444,40.665 XS1.3
RTS: D1.9 D5.4 | length 24.3
  Top Layer w0.6: D1.9 26.845,46.055 27.5,45.4 27.5,29.7 29.52,27.68 D5.4
RxD: D1.10 D3.1 | length 13.7
  Top Layer w0.6: D1.10 28.075,47.325 29,46.4 29,41.1 30.11,39.99 D3.1
SYNC_IN1_N: D6.7 R15.1 XS1.9 | length 23.9
  Top Layer w0.8: D6.7@38,21.935 40.475,21.935 R15.1@40.775,22.235 ; R15.1 41.225,22.235 41.525,21.935 47.435,21.935 50.936,25.436 50.936,26.664 v1(50.9,26.7)
  Bottom Layer w0.8: v1(50.9,26.7) 52.93,24.67 57,24.67 57.625,24.045 XS1.9
SYNC_IN1_P: D6.6 R15.2 XS1.8 | length 23.8
  Top Layer w0.8: D6.6@37.9,20.435 40.475,20.435 R15.2@40.775,20.135 ; R15.2 41.225,20.135 41.525,20.435 48.135,20.435 53,25.3 53,25.931 53.7,26.631 v1(53.7,26.8)
  Bottom Layer w0.8: v1(53.7,26.8) 53.853,26.647 55.523,26.647 56,26.17 57,26.17 57.645,26.815 XS1.8
SYNC_IN2_N: D7.7 R16.1 XS1.22 | length 43.2
  Top Layer w0.8: D7.7@38,4.935 40.475,4.935 R16.1@40.775,5.235 ; R16.1 41.225,5.235 41.525,4.935 42.6,4.935 48.665,11 61.8,11 64.6,13.8 64.6,17.284 64,17.884 v1(64,18.1)
  Bottom Layer w0.8: XS1.22 61.216,22.66 61.656,23.1 62.75,23.1 64.65,21.2 64.65,18.966 64,18.316 v1(64,18.1)
SYNC_IN2_P: D7.6 R16.2 XS1.21 | length 48.5
  Top Layer w0.8: D7.6@37.9,3.435 40.475,3.435 R16.2@40.775,3.135 ; R16.2 41.225,3.135 41.525,3.435 43.221,3.435 49.286,9.5 62.421,9.5 66.1,13.179 66.1,17.284 66.8,17.984 v1(66.8,18.2)
  Bottom Layer w0.8: XS1.21 61.17,25.43 61.9,24.7 63.271,24.7 66.15,21.821 66.15,19.066 66.8,18.416 v1(66.8,18.2)
SYNC_OUT_N: D8.7 R17.1 XS1.10 | length 24.6
  Top Layer w0.8: D8.7@38,13.45 40.475,13.45 R17.1@40.775,13.75 ; R17.1 41.225,13.75 41.525,13.45 45.15,13.45 49.6,17.9 49.6,19.203 50.947,20.55 52.134,20.55 52.784,21.2 v1(53,21.2)
  Bottom Layer w0.8: v1(53,21.2) 53.216,21.2 53.866,20.55 56.9,20.55 57.625,21.275 XS1.10
SYNC_OUT_P: D8.6 R17.2 XS1.11 | length 24.7
  Top Layer w0.8: D8.6@37.9,11.95 40.475,11.95 R17.2@40.775,11.65 ; R17.2 41.225,11.65 41.525,11.95 45.771,11.95 51.1,17.279 51.1,18.581 51.569,19.05 52.234,19.05 52.884,18.4 v1(53.1,18.4)
  Bottom Layer w0.8: v1(53.1,18.4) 53.316,18.4 53.966,19.05 56.9,19.05 57.445,18.505 XS1.11
TxD: D1.12 D4.4 | length 8.9
  Top Layer w0.6: D1.12 27.465,49.865 30.78,53.18 D4.4
pads on no net: D2.4 D3.4 D4.1 D5.1 D6.4 D7.4 D8.1 XP1.8 XP1.9 XS1.15 XS1.16 XS1.17 XS1.18 XS1.19 XS1.20

## Polygon pours and split planes (outlines as drawn)
GND on Bottom Layer "GND_L02_P002" (solid, pour order 2): 0,60 70,60 70,0 0,0
+3.3V on Bottom Layer "+3.3V_L02_P000" (solid, pour order 0): 22.6,20.2 24.3,20.2 28,16.5 31.5,16.5 33.5,14.5 37.4,14.5 38.5,15.6 38.5,17 41,17 42,18 42,22 41,23 39.2,23 38.5,23.7 38.5,25.5 40.5,25.5 42,27 42,29 40.7,30.3 39,30.3 30,30.3 29.5,30.8 29.5,32.8 30.2,33.5 31.6,33.5 33.6,31.5 36.1,31.5 37,32.4 37,33.3 37.7,34 40.5,34 42,35.5 42,39.1 41.1,40 38.6,40 38,40.6 38,42.1 38.3,42.4 40.8,42.4 41,42.6 41,44.3 36.5,48.8 36.5,51.5 32.5,55.5 26.1,55.5 25.6,56 25.6,58.1 26.1,58.6 32.1,58.6 33.4,57.3 37.2,57.3 38,58.1 38,59 38.6,59.6 40.8,59.6 40.8,56.3 38.3,53.8 38.3,50.9 40.8,50.9 43.5,48.2 43.5,9.6 40.4,6.5 38.7,6.5 38.3,6.9 38.3,8.6 40.4,8.6 41.3,9.5 41.3,11.5 40.3,12.5 27.5,12.5 22,18 22,19.6
+12V on Bottom Layer "+12V_L02_P001" (solid, pour order 1): 6.7,22 16.5,22 18.5,20 18.5,7.5 20.5,5.5 41.1,5.5 44.5,8.9 52,16.4 58.7,16.4 59.2,15.9 59.2,12.9 58.5,12.2 51.2,12.2 46.5,7.5 42.5,3.5 26.1,3.5 24.1,1.5 21,1.5 16.5,6 16.5,19.5 15.5,20.5 8.9,20.5 8.3,19.9 6.5,19.9 6.1,20.3 6.1,21.4
GND on Top Layer "GND_L01_P003" (solid, pour order 3): 0,60 70,60 70,0 0,0

## Other copper
Bottom Layer:
  region net +12V: 6.5,22 8.2,22 8.2,19.9 6.3,19.9 5.8,20.4 5.8,21.3
  region net +12V: 55,16.4 58.6,16.4 58.6,12.2 55,12.2
Multi-Layer:
  pour cut-out: 55.8,11.3 62.8,11.3 62.8,48 55.8,48
  pour cut-out: 5,14.3 8,14.3 8,44.9 5,44.9

## Silkscreen, mask and mechanical layers (free items; w line width, h text height)
Mechanical 1:
  the board outline again, w0.2